# EAGLE board main-board (EAGLE 9.3.0)

Size 45.39 x 80 mm. Coordinates in mm from the lower left corner, seen from the top.
Outline: 0,0 45.39,0 45.39,80 0,80 0,0
Copper layers (1*16): Top 0.035mm / dielectric 1.5mm / Bottom 0.035mm
Design rules "default": minimum track width 6mil, minimum drill 0.35mm, track to track 6mil, track to pad 6mil, pad to pad 6mil, via to via 6mil, smd to smd 6mil, copper to edge 40mil, drill to drill 6mil, minimum pad ring 10mil, minimum via ring 8mil, stop-mask expansion 4mil, vias tented up to drill 0mil, thermal gap 10mil

## Footprints (pad centres in the part's own frame; a part is rotated, then mirrored left to right if it is on the bottom)
BATTCOM_20MM_PTH = drill 1.3: 1 11.85,0; 2 -8.15,0
0805 = smd 0.8 x 1.2: 1 -0.9,0; 2 0.9,0
0603 = smd 1.1 x 1: 1 -0.85,0; 2 0.85,0
LED-0603 = smd 1 x 1: A -0.877,0; C 0.877,0
SOD-123 = smd 1.2 x 0.7: A 1.85,0; C -1.85,0
SAM-M8Q = smd 1.8 x 1.5: 1 -6.6,3.8; 2 -6.6,1.9; 3 -6.6,0; 4 -6.6,-1.9; 5 -6.6,-3.8; 11 6.6,-3.8; 12 6.6,-1.9; 13 6.6,0; 14 6.6,1.9; 15 6.6,3.8 | smd 1.5 x 1.8: 6 -3.8,-6.6; 7 -1.9,-6.6; 8 0,-6.6; 9 1.9,-6.6; 10 3.8,-6.6; 16 3.8,6.6; 17 1.9,6.6; 18 0,6.6; 19 -1.9,6.6; 20 -3.8,6.6
JST-2-SMD = smd 1 x 4.6: 1 -1,-3.7; 2 1,-3.7 | smd 1.6 x 3.4: NC1 -3.4,1.5; NC2 3.4,1.5
USB-B-MICRO-SMD = smd 1.45 x 0.4: D+ 2.725,0; D- 2.725,0.65; GND 2.725,-1.3; ID 2.725,-0.65; VBUS 2.725,1.3 | smd 1.5 x 1.8: SHIELD1 0,3.685; SHIELD2 0,-3.685 | smd 1.5 x 2.5: SHIELD3 0,0 | hole 0.85: 2.2,1.9; 2.2,-1.9
MODULE_ESP32-WROOM-32D = smd 2 x 0.9: 1 -8.5,5.26; 2 -8.5,3.99; 3 -8.5,2.72; 4 -8.5,1.45; 5 -8.5,0.18; 6 -8.5,-1.09; 7 -8.5,-2.36; 8 -8.5,-3.63; 9 -8.5,-4.9; 10 -8.5,-6.17; 11 -8.5,-7.44; 12 -8.5,-8.71; 13 -8.5,-9.98; 14 -8.5,-11.25; 25 8.5,-11.25; 26 8.5,-9.98; 27 8.5,-8.71; 28 8.5,-7.44; 29 8.5,-6.17; 30 8.5,-4.9; 31 8.5,-3.63; 32 8.5,-2.36; 33 8.5,-1.09; 34 8.5,0.18; 35 8.5,1.45; 36 8.5,2.72; 37 8.5,3.99; 38 8.5,5.26 | smd 0.9 x 2: 15 -5.715,-12.25; 16 -4.445,-12.25; 17 -3.175,-12.25; 18 -1.905,-12.25; 19 -0.635,-12.25; 20 0.635,-12.25; 21 1.905,-12.25; 22 3.175,-12.25; 23 4.445,-12.25; 24 5.715,-12.25 | smd 5 x 5: 39 -1,-2.24
QFN50P400X400X80-25N = smd 0.84 x 0.26: 1 -1.97,1.25 | smd 0.82 x 0.26: 2 -1.955,0.75; 3 -1.955,0.25; 4 -1.955,-0.25; 5 -1.955,-0.75; 6 -1.955,-1.25; 13 1.955,-1.25; 14 1.955,-0.75; 15 1.955,-0.25; 16 1.955,0.25; 17 1.955,0.75; 18 1.955,1.25 | smd 0.26 x 0.82: 7 -1.25,-1.955; 8 -0.75,-1.955; 9 -0.25,-1.955; 10 0.25,-1.955; 11 0.75,-1.955; 12 1.25,-1.955; 19 1.25,1.955; 20 0.75,1.955; 21 0.25,1.955; 22 -0.25,1.955; 23 -0.75,1.955; 24 -1.25,1.955 | smd 2.7 x 2.7: 25 0,0
SOT95P285X140-5N = smd 1.35 x 0.6: 1 -1.185,0.95; 2 -1.185,0; 3 -1.185,-0.95; 4 1.185,-0.95; 5 1.185,0.95
SON50P200X300X100-9N = smd 0.84 x 0.27: 1 -1.435,0.75; 2 -1.435,0.25; 3 -1.435,-0.25; 4 -1.435,-0.75; 5 1.435,-0.75; 6 1.435,-0.25; 7 1.435,0.25; 8 1.435,0.75 | smd 1.625 x 1.425: 9 0,0
SOT95P240X105-3N = smd 1.321 x 0.559: 1 -1.016,0.965; 2 -1.016,-0.965; 3 1.016,0

## Placement (x,y rotation side)
BT1  [BATTCOM_20MM_PTH]  16.51,34.29 180 top
C1  10uF  [0805]  72.39,34.29 0 top  (outside the outline)
C2  10uF  [0805]  68.58,34.29 0 top  (outside the outline)
C3  1.0uF  [0805]  64.77,34.29 0 top  (outside the outline)
C4  10uF  [0805]  60.96,34.29 0 top  (outside the outline)
C5  0.1uF  [0603]  53.34,34.29 0 top  (outside the outline)
C6  10uF  [0805]  57.15,34.29 0 top  (outside the outline)
D1  Yellow  [LED-0603]  85.09,41.91 0 top  (outside the outline)
D2  [SOD-123]  13.97,48.26 0 top
IC1  SAM-M8Q  [SAM-M8Q]  22.86,10.16 0 top
J1  [JST-2-SMD]  40.64,34.29 270 top
J2  [USB-B-MICRO-SMD]  39.37,77.47 270 top
R1  4.7k  [0603]  49.53,34.29 0 top  (outside the outline)
R2  1k  [0603]  96.52,41.91 0 top  (outside the outline)
R3  100k  [0603]  92.71,41.91 0 top  (outside the outline)
R4  100k  [0603]  88.9,41.91 0 top  (outside the outline)
U2  ESP32-WROOM-32D  [MODULE_ESP32-WROOM-32D]  22.86,64.77 0 top
U3  CP2104-F03-GM  [QFN50P400X400X80-25N]  40.64,63.5 270 top
U4  AP2112K-3.3TRG1  [SOT95P285X140-5N]  22.86,46.99 0 top
U5  MCP73831-2ACI/MC  [SON50P200X300X100-9N]  39.37,20.32 0 top
U6  DMG3415U-7  [SOT95P240X105-3N]  31.75,43.18 0 top
U7  DMG3415U-7  [SOT95P240X105-3N]  31.75,22.86 0 top

## Library data of the parts
BT1 = SparkFun-Batteries; PROD_ID: BATT-09031; SF_SKU: PRT-00783
C1 C2 C4 C6 = SparkFun-Capacitors; PROD_ID: CAP-11330
C3 = SparkFun-Capacitors; PROD_ID: CAP-11625
C5 = SparkFun-Capacitors; PROD_ID: CAP-00810
D1 = SparkFun-LED; PROD_ID: DIO-09003
D2 = adafruit
IC1 = hermes-parts
J1 = SparkFun-Connectors; PROD_ID: CONN-11443; SF_ID: PRT-08612
J2 = SparkFun-Connectors; PROD_ID: CONN-11752
R1 = SparkFun-Resistors; PROD_ID: RES-07857
R2 = SparkFun-Resistors; PROD_ID: RES-07856
R3 R4 = SparkFun-Resistors; PROD_ID: RES-07828
U2 = SnapEDA-Library; MANUFACTURER: Espressif Systems; PARTREV: 1.5; STANDARD: Manufacturer Recommendation
U3 = SnapEDA-Library; MANUFACTURER: Silicon Labs; PARTREV: 1.2; STANDARD: IPC7351B
U4 = SnapEDA-Library; MANUFACTURER: Diodes Inc.; PARTREV: 2-2
U5 = SnapEDA-Library; MANUFACTURER: MICROCHIP; PARTREV: G; STANDARD: IPC 7351B
U6 U7 = SnapEDA-Library; MPN: DMG3415U-7; OC_FARNELL: 1843688; OC_NEWARK: 12T2026; PACKAGE: SOT-23-3; SUPPLIER: Diodes Inc

## Nets
3.3V: C2.1 C3.1 U2.2 U4.5 U7.2
EP: U5.9
GND: BT1.2 C1.2 C2.2 C3.2 C4.2 C5.2 C6.2 IC1.1 IC1.4 IC1.5 IC1.6 IC1.10 IC1.11 IC1.15 IC1.16 IC1.20 J1.1 J2.GND R1.2 R3.1 U2.1 U2.15 U2.38 U2.39 U3.2 U3.25 U4.2 U5.6
GPSENABLE: U2.28 U7.1
GPSRX: IC1.13 U2.31
GPSTX: IC1.14 U2.30
N$1: R1.1 U5.8
N$2: R2.2 U5.5
N$3: D1.C R2.1
N$4: C4.1 D2.C R4.1 U4.1 U6.3
N$5: R4.2 U4.3
N$6: C5.1 IC1.2 IC1.17 U7.3
N$7: BT1.1 IC1.3
N$9: J2.D+ U3.3
N$10: J2.D- U3.4
REGIN: C6.1 U3.5 U3.6 U3.7
USBRX: U2.34 U3.21
USBTX: U2.35 U3.20
V_BATT: C1.1 J1.2 U5.3 U5.4 U6.2
VCC: D1.A D2.A J2.VBUS R3.2 U3.8 U5.1 U5.2 U6.1

## Tracks (layer width: path | path; a pad name or v marks a point on that pad's centre or on a via)
3.3V  (4 unrouted)
GND  (27 unrouted)
GPSENABLE  (1 unrouted)
GPSRX  (1 unrouted)
GPSTX  (1 unrouted)
N$1  (1 unrouted)
N$2  (1 unrouted)
N$3  (1 unrouted)
N$4  (4 unrouted)
N$5  (1 unrouted)
N$6  (3 unrouted)
N$7  (1 unrouted)
N$9  (1 unrouted)
N$10  (1 unrouted)
REGIN  (3 unrouted)
USBRX  (1 unrouted)
USBTX  (1 unrouted)
V_BATT  (4 unrouted)
VCC  (7 unrouted)